# Altium PCB arduinonano.PcbDoc
Units mil, origin at the board's own origin, x right, y up, seen from the top; angles counter-clockwise.
Board outline 750 x 1700 mil, 6 copper layers (Top Layer 1, signal Top, VCC, GND, signal bottom, Bottom Layer 1), stack 35.621 mil thick; 24 components, 42 nets, 163 pads, 68 vias.
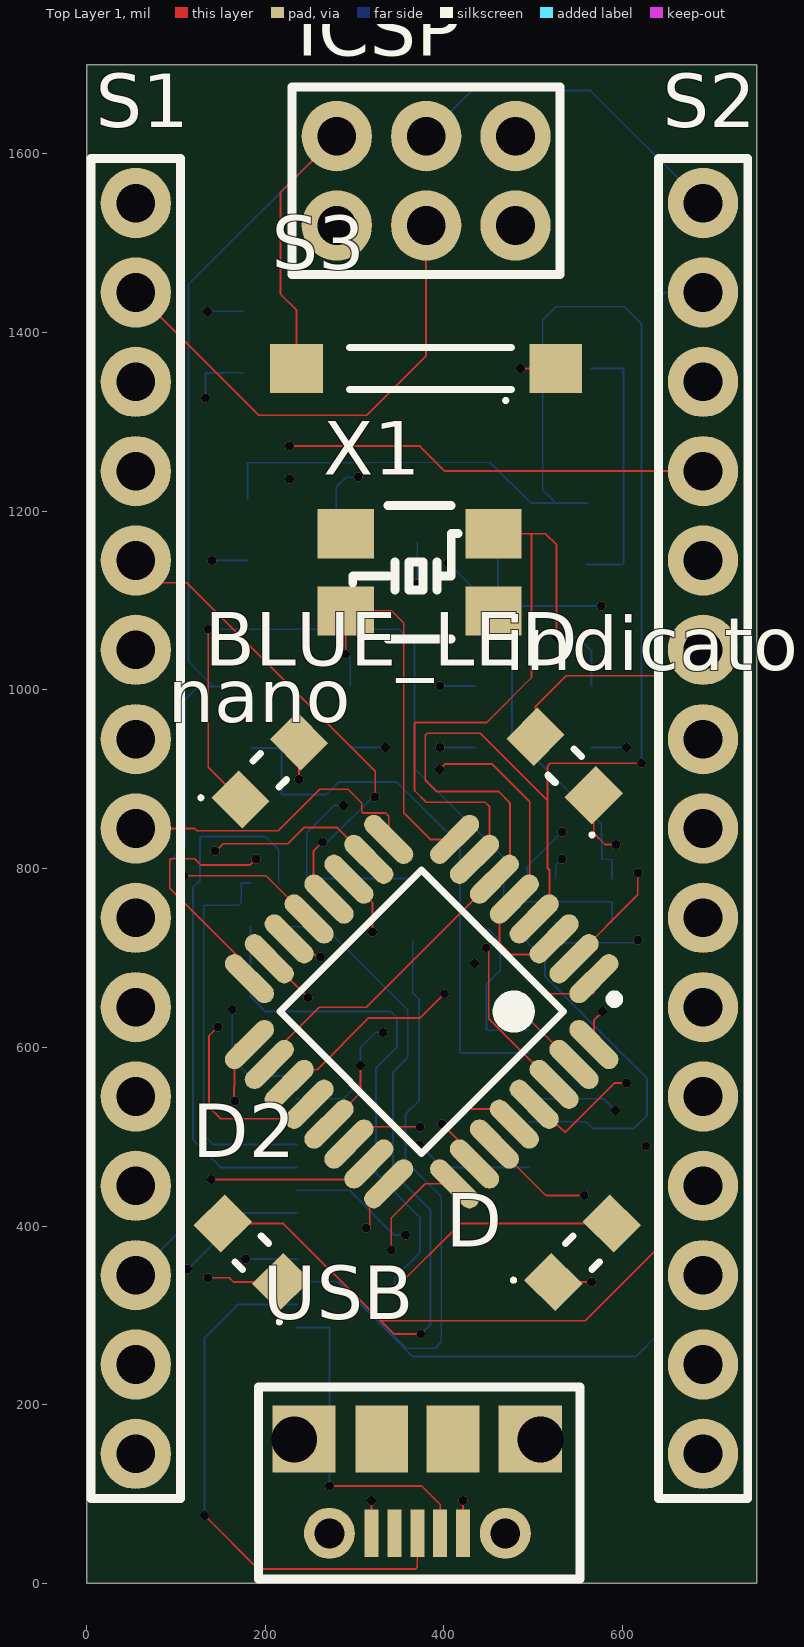
[diagram p0: Top Layer 1 view]
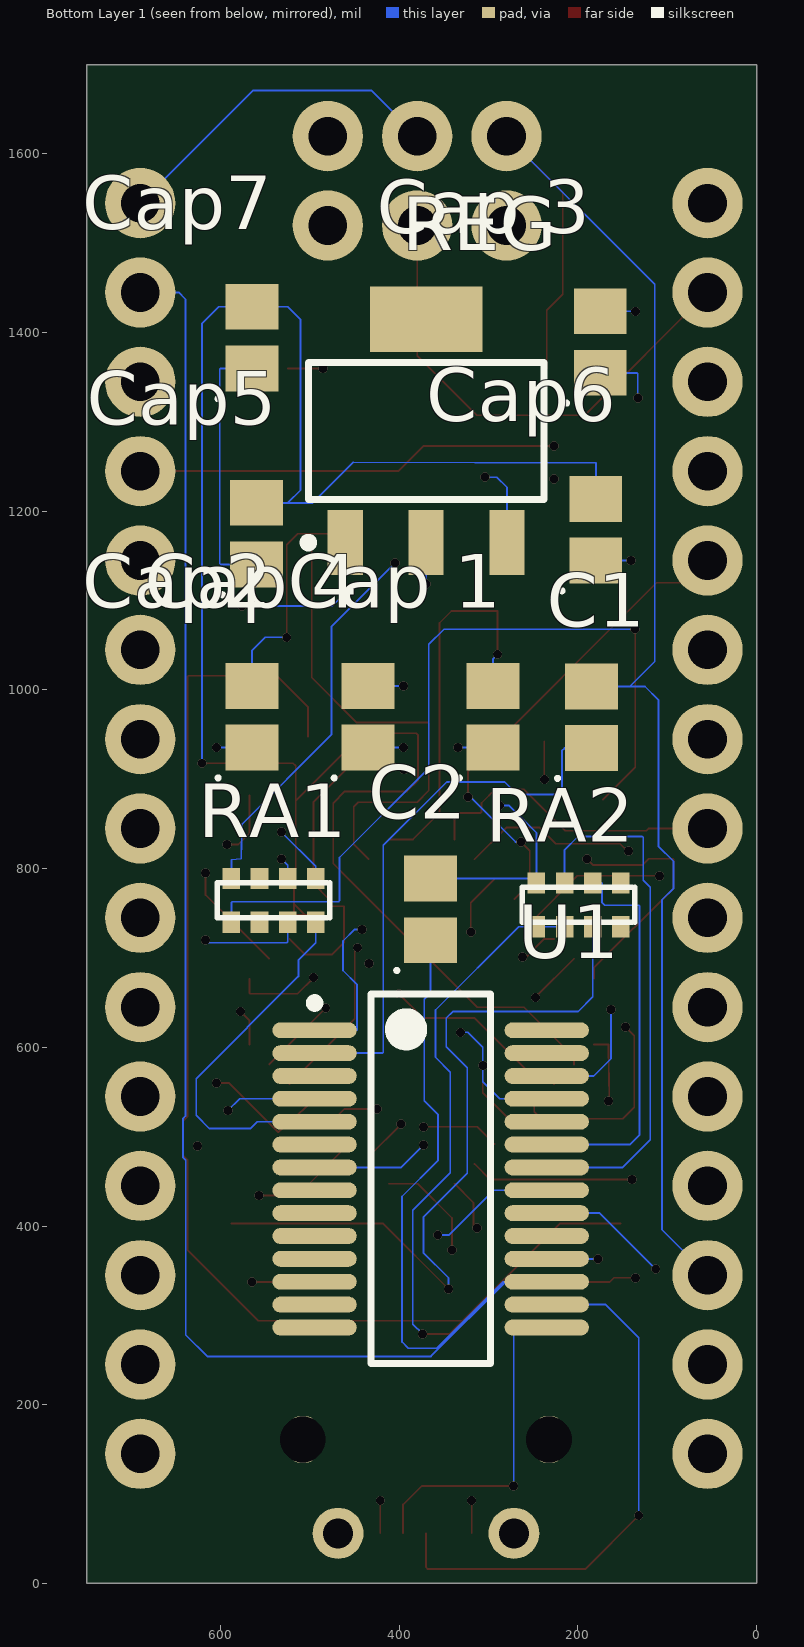
[diagram p1: Bottom Layer 1 view, seen from below]
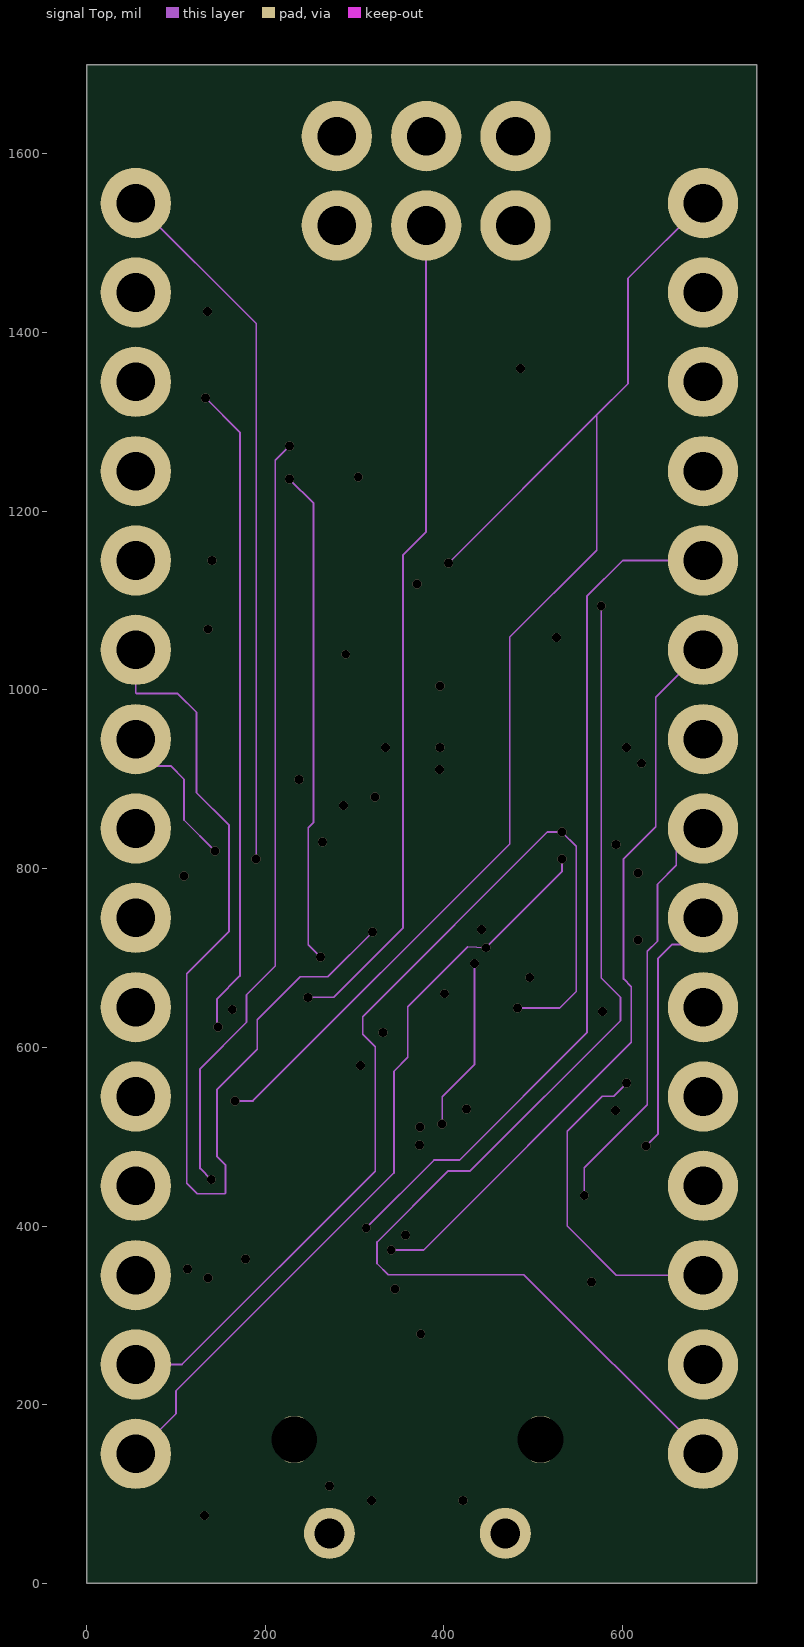
[diagram p2: signal Top]
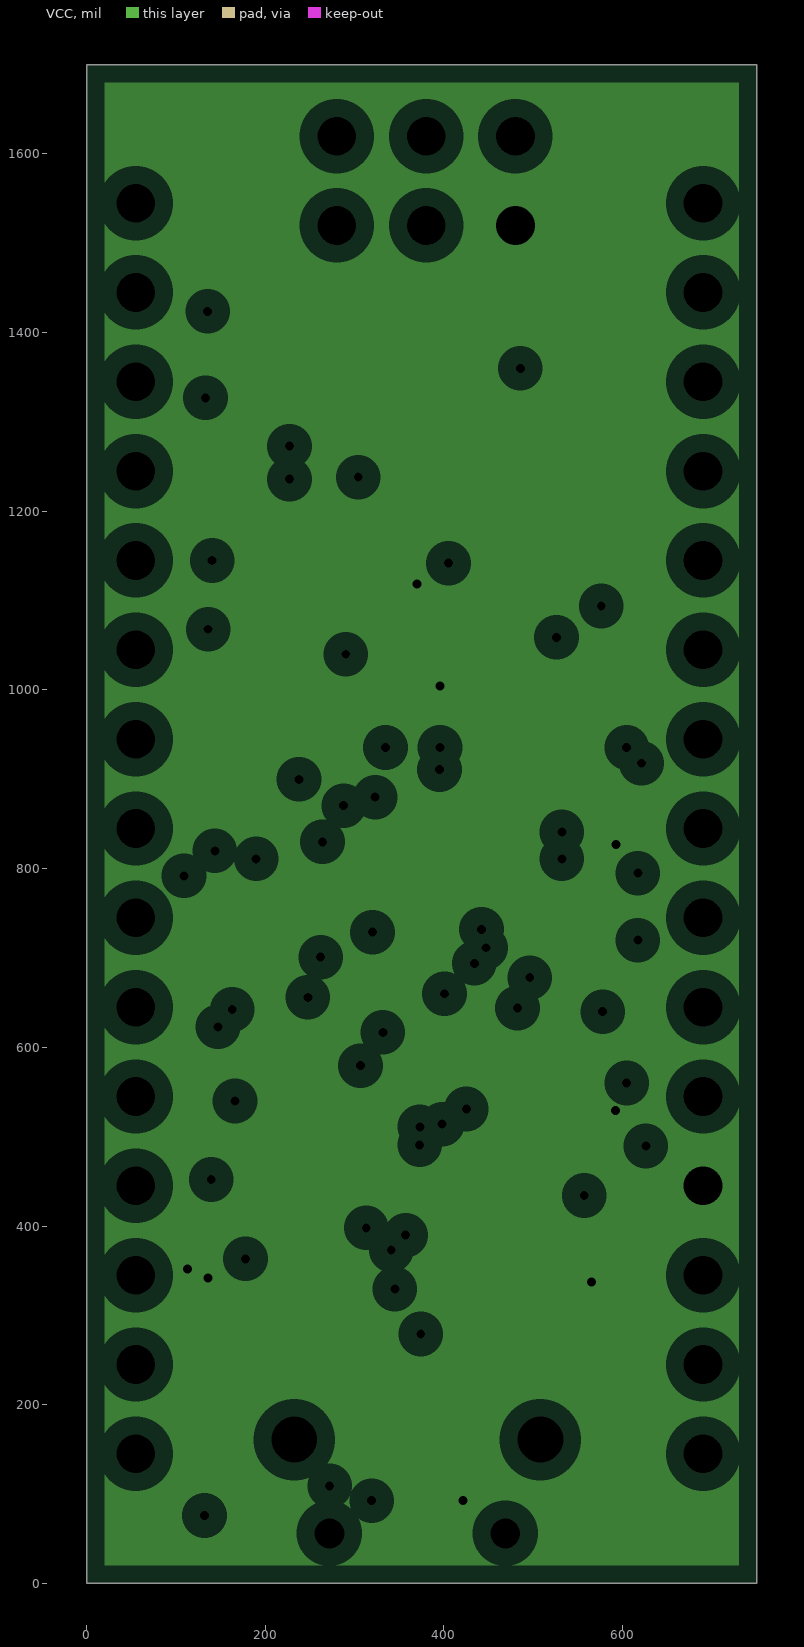
[diagram p3: VCC, clearances drawn from the general rule]
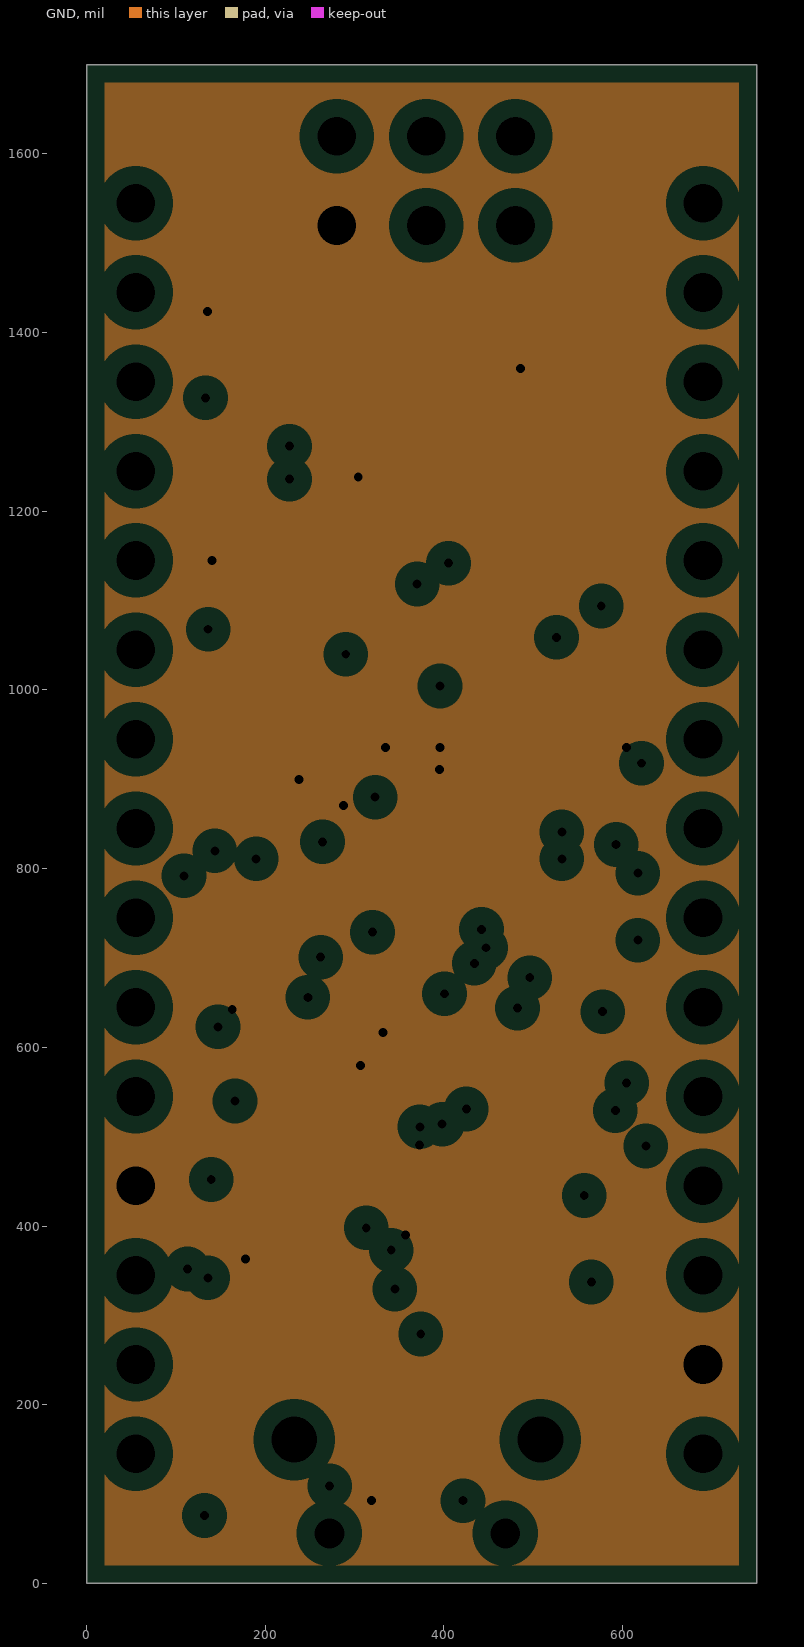
[diagram p4: GND, clearances drawn from the general rule]
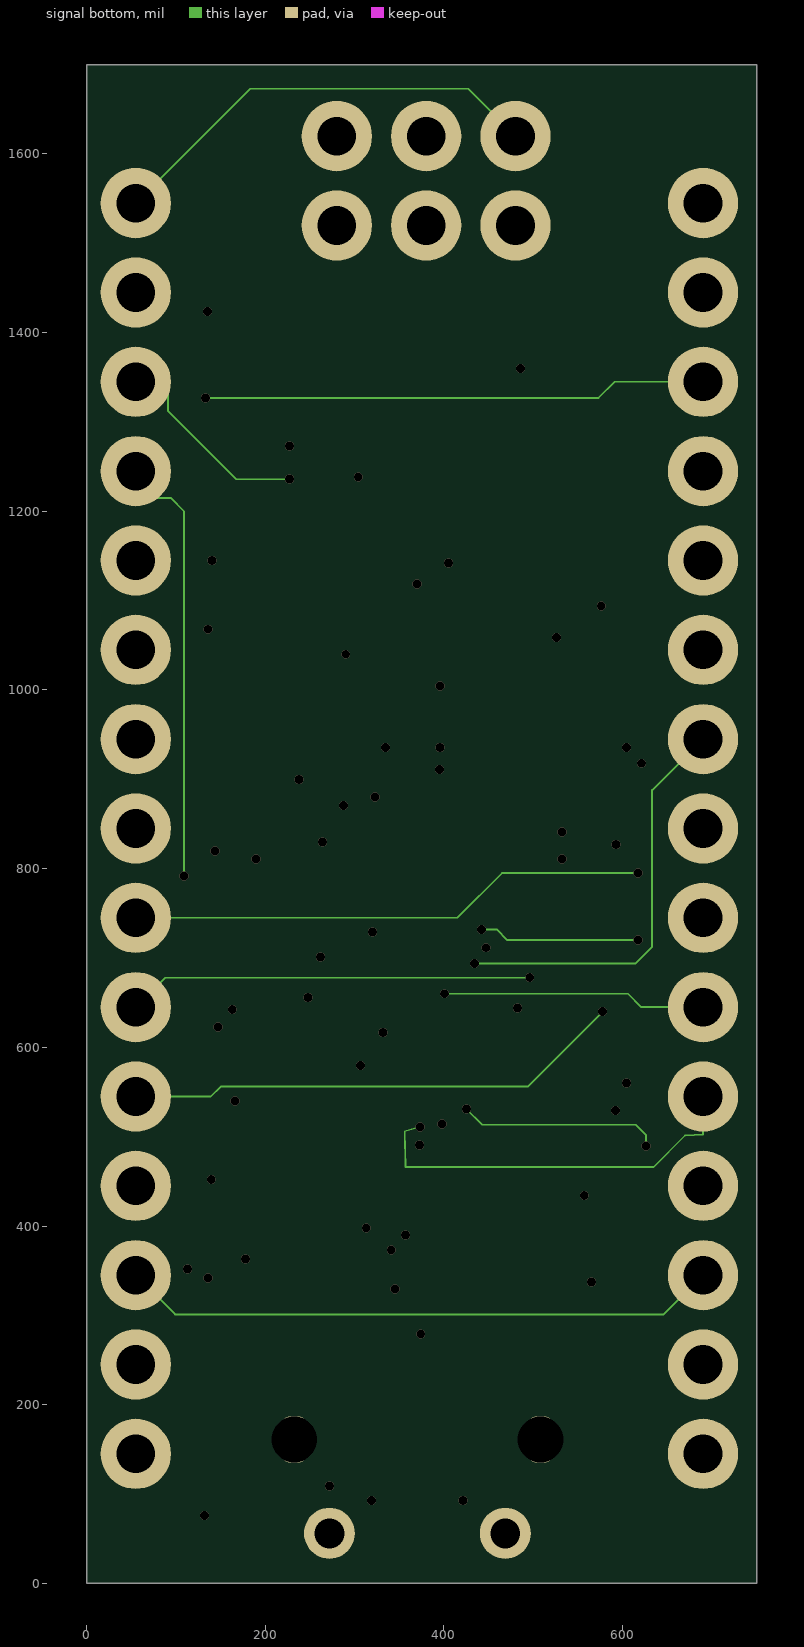
[diagram p5: signal bottom]

## Layer stack, top to bottom
Top Solder: solder mask 0.4, Solder Resist, Dk 3.5
Top Layer 1: signal copper 1.378
Dielectric 6: prepreg 2.8, PP-006, Dk 4.1
Dielectric 4: prepreg 2.8, PP-006, Dk 4.1
signal Top: signal copper 0.3543
Dielectric 2: prepreg 2.8, PP-006, Dk 4.1
VCC: plane copper 1.378, net +5
Dielectric 1: dielectric 12.6, FR-4, Dk 4.8
GND: plane copper 1.378, net gnd
Dielectric 3: prepreg 2.8, PP-006, Dk 4.1
signal bottom: signal copper 0.3543
Dielectric 5: prepreg 2.8, PP-006, Dk 4.1
Dielectric 7: prepreg 2.8, PP-006, Dk 4.1
Bottom Layer 1: signal copper 1.378
Bottom Solder: solder mask 0.4, Solder Resist, Dk 3.5

## Board outline
0,0 750,0 750,1700 0,1700

## Design rules (kind name [scope] priority, off if disabled: settings)
Clearance Clearance_1 [All] p1: gap=10 ignorepadtopadclearanceinfootprint=FALSE
Clearance [All] p2: gap=10 ignorepadtopadclearanceinfootprint=TRUE except(9: Arc-SMDPad Track-SMDPad SMDPad-SMDPad)
HoleSize [All] p1: absolutevalues=TRUE maxlimit=10 minlimit=1 maxpercent=80.000 minpercent=20.000
PlaneClearance [All] p1: clearance=20
PlaneConnect [All] p1: planeconnectstyle=Relief reliefexpansion=20 reliefentries=4 reliefconductorwidth=10 reliefairgap=10
PolygonConnect [All] p1: connectstyle=Relief reliefconductorwidth=10 reliefentries=4 polygonreliefangle="90 Angle" airgapwidth=10
RoutingVias [All] p1: holewidth=10 width=10 viastyle="Through Hole" minholewidth=5 minwidth=5 maxholewidth=8 maxwidth=8
SolderMaskExpansion [All] p1: expansion=4 istentingtop=FALSE
SupplyNets "Schematic Supply Nets_4" [InNet('+5v')] p1: voltage=0.000
SupplyNets "Schematic Supply Nets_3" [InNet('gnd')] p2: voltage=0.000
SupplyNets "Schematic Supply Nets_2" [InNet('+5')] p3: voltage=0.000
SupplyNets "Schematic Supply Nets_1" [InNet('3V3')] p4: voltage=0.000
SupplyNets "Schematic Supply Nets" [InNet('VIN')] p5: voltage=0.000
Width [All] p1: maxlimit=3 minlimit=1.5 preferedwidth=2 minimp=50.000000 maximp=50.000000 favimp=50.000000
27 further rules are at their usual default settings.

## Components (designator, comment, footprint, x,y, rotation, side; value= is the part's Value field where it differs from the comment)
BLUE_LED "Kingbright Blue LED, 60 mcd 120 ° 0805" LED1913X12NBLUE 205,910 r45 top
C1 "C0805C180J5GACTU" CAPCP2012X09N 185,969.45 r90 bottom
C2 "C0805C180J5GACTU" CAPCP2012X09N 365,754.45 r90 bottom
Cap2 "C0805C180J5GACTU" CAPCP2012X09N 565,970 r90 bottom
Cap5 "C0805C180J5GACTU" CAPCP2012X09N 560,1175 r90 bottom
Cap6 "C0805C180J5GACTU" CAPCP2012X09N 180,1179.45 r90 bottom
Cap7 "C0805C180J5GACTU" CAPCP2012X09N 565,1394.45 r90 bottom
"Cap 1" "C0805C180J5GACTU" CAPCP2012X09N 295,970 r90 bottom
"Cap 3" "100nF Ceramic Multilayer Capacitor_1" CAPCP2012X09N 175,1389.45 r90 bottom
"Cap 4" "100nF Ceramic Multilayer Capacitor_1" CAPCP2012X09N 435,970 r90 bottom
D "Kingbright Red LED, 100 mcd 120 ° 0805" LED1913X12NRED 555,370 r45 top
D2 "Kingbright Green LED, 70 mcd 120 ° 0805" LED1913X12NGREEN 185,370 r135 top
ICSP "Programming Headers Dual Row" "ISP HEADER" 1175,1065 r180 top
indicator "Kingbright Green LED, 70 mcd 120 ° 0805" LED1913X12NGREEN 535,915 r135 top
nano "Atmega328/p" TQFP80P900X900X120-32N 375,640 r225 top
RA1 "1k +- 5% SMT Resistor Array" "1206 RA" 587.99,784 r180 bottom
RA2 "1k +- 5% SMT Resistor Array" "1206 RA" 246.5,779 r180 bottom
REG "LM1117MP-5.0/NOPB, Low Dropout Voltage Regulator, 1.5A, 5 V ±1%, 4-Pin SOT-223" SOT230P700X180-4N 370,1290 r90 bottom
S1 "connector;str header;single row;.1 cont centers;.095 tail;gold or gtx;36 contact" Header 55,145 r90 top
S2 "connector;str header;single row;.1 cont centers;.095 tail;gold or gtx;36 contact" Header 690,145 r90 top
S3 "Button Tactile Switch, NO 0.05 A 0.8mm" Button8014X17N 385,1360 r180 top
U1 "FT232RL, Universal Asynchronous Receiver & Transmitter 3MBd, 28-Pin, SSOP" SOP65P780X200-28N 364.92,452.8 r180 bottom
USB "NewMolex Right Angle SMT Female Type B Micro USB Connector, 30 V ac, 1.8A" MicroUSB 418.58,56 r180 top
X1 "Aker 16MHz Crystal SMT" "Aker S5C Crystal" 455.35,1175 r0 top value=16MHz

## Footprints (in the part's own frame and the unit in brackets; to place one, negate y for a bottom-side part, rotate by r counter-clockwise, add the part's x,y. Pads: shape width x height; smd on the part's side, far side on the other; paste and mask are expansions set on the pad)
"1206 RA" [mm]
  rect 0.5x0.6 smd: 1(0,0.127) 2(0.8,0.127) 3(1.6,0.127) 4(2.4,0.127) 5(0,-1.118) 6(0.8,-1.118) 7(1.6,-1.118) 8(2.4,-1.118)
  silkscreen extent -0.41,-0.99 2.79,0.01, body extent -0.41,-1.31 2.79,0.29, height 0.5
"Aker S5C Crystal" [mm]
  rect 1.6x1.4 smd: 1(0,0) 2(-4.2,0) 3(0,-2.2) 4(-4.2,-2.2)
  round 0.254 on Top Overlay: 5(-3,-2.4)
  silkscreen extent -4,-3 -1,0.8, body extent -4.7,-2.8 0.5,0.6, height 1
Button8014X17N [mm] "Chip Inductor, 2-Leads, Body 8.00x1.40mm, IPC Medium Density"
  rect 1.5x1.4 smd: 1(-3.556,0) 2(3.81,0)
  silkscreen extent -2.3,-0.6 2.3,0.96, body extent -3.79,-1.92 4.21,1.78, height 2.5
CAPCP2012X09N [mm] "Chip Capacitor, 2-Leads, Body 2.00x1.25mm, IPC Medium Density"
  rect 1.3x1.5 smd: 1(-0.875,0) 2(0.875,0)
  silkscreen extent -1.79,0.91 -1.69,1.01, body extent -1.05,-0.57 0.95,0.68, height 0.78
Header [mm] "SIL Header"
  round 2 hole 1.1: 1(0,0) 2(2.54,0) 3(5.08,0) 4(7.62,0) 5(10.16,0) 6(12.7,0) 7(15.24,0) 8(17.78,0) 9(20.32,0) 10(22.86,0) 11(25.4,0) 12(27.94,0) 13(30.48,0) 14(33.02,0) 15(35.56,0)
  silkscreen extent -1.27,-1.27 36.83,1.27, body extent -1.33,-1.35 36.93,1.35, height 8.6
"ISP HEADER" [mm] "SIL Header for programming"
  round 2 hole 1.1: 1(17.653,-14.097) 2(17.653,-11.557) 3(20.193,-14.097) 4(20.193,-11.557) 5(22.733,-14.097) 6(22.733,-11.557)
  silkscreen extent 16.38,-15.49 24,-10.16, body extent 16.38,-15.37 24,-10.29, height 8
LED1913X12NBLUE [mm] "LED 2-Leads, Body 1.90x1.32mm, IPC Medium Density"
  rect 1.1x1.25 smd: 1(-1.175,0) 2(1.175,0)
  silkscreen extent -1.99,-0.53 0.15,0.89, body extent -1,-0.62 1.02,0.62, height 1.1
LED1913X12NGREEN [mm] "LED 2-Leads, Body 1.90x1.32mm, IPC Medium Density"
  rect 1.1x1.25 smd: 1(-1.175,0) 2(1.175,0)
  silkscreen extent -1.99,-0.53 0.15,0.89, body extent -1.01,-0.62 1.01,0.63, height 1.1
LED1913X12NRED [mm] "LED 2-Leads, Body 1.90x1.32mm, IPC Medium Density"
  rect 1.1x1.25 smd: 1(-1.175,0) 2(1.175,0)
  silkscreen extent -1.99,-0.53 0.15,0.89, body extent -1.02,-0.43 1.04,0.47, height 0.85
MicroUSB [mm] "MicroUSB  Molex 5Pin"
  rect 0.4x1.35 smd: 1(-0.07,0) 2(0.58,0) 3(1.23,0) 4(1.88,0) 5(2.53,0)
  rrect50% 0.6x1.3 hole 1.3: ""(-2.27,-2.667) ""(-2.27,-2.667) ""(4.73,-2.667)
  rect 1.8x1.9 smd: ""(-1.98,-2.678) ""(4.45,-2.678)
  round 1.45 hole 0.85: ""(-1.27,0) ""(3.73,0)
  rect 1.5x1.9 smd: ""(0.218,-2.678) ""(2.242,-2.678)
  silkscreen extent -3.39,-4.17 5.75,1.3, body extent -2.83,-5.32 5.37,0.11, height 2.68
SOP65P780X200-28N [mm] "SOP, 28-Leads, Body 10.20x5.30mm, Pitch 0.65mm, IPC Medium Density"
  oval 2.4x0.45 smd: 1(-3.3,4.225) 2(-3.3,3.575) 3(-3.3,2.925) 4(-3.3,2.275) 5(-3.3,1.625) 6(-3.3,0.975) 7(-3.3,0.325) 8(-3.3,-0.325) 9(-3.3,-0.975) 10(-3.3,-1.625) 11(-3.3,-2.275) 12(-3.3,-2.925) 13(-3.3,-3.575) 14(-3.3,-4.225) 15(3.3,-4.225) 16(3.3,-3.575) 17(3.3,-2.925) 18(3.3,-2.275) 19(3.3,-1.625) 20(3.3,-0.975) 21(3.3,-0.325) 22(3.3,0.325) 23(3.3,0.975) 24(3.3,1.625) 25(3.3,2.275) 26(3.3,2.925) 27(3.3,3.575) 28(3.3,4.225)
  silkscreen extent -3.43,-5.25 1.7,5.25, body extent -3.91,-5.1 3.91,5.1, height 2
SOT230P700X180-4N [mm] "SOT223, 4-Leads, Body 6.50x7.00mm (avg), Pitch 2.30mm, IPC Medium Density"
  rect 1.85x1 smd: 1(-3.175,2.3) 2(-3.175,0) 3(-3.175,-2.3)
  rect 1.85x3.2 smd: 4(3.175,0)
  silkscreen extent -3.3,-3.35 1.95,3.48, body extent -3.8,-3.12 3.29,3.38, height 1.65
TQFP80P900X900X120-32N [mm] "TQFP, 32-Leads, Body 7.00x7.00mm, Pitch 0.80mm, IPC Medium Density"
  oval 1.75x0.55 smd: 1(-4.125,2.8) 2(-4.125,2) 3(-4.125,1.2) 4(-4.125,0.4) 5(-4.125,-0.4) 6(-4.125,-1.2) 7(-4.125,-2) 8(-4.125,-2.8) 17(4.125,-2.8) 18(4.125,-2) 19(4.125,-1.2) 20(4.125,-0.4) 21(4.125,0.4) 22(4.125,1.2) 23(4.125,2) 24(4.125,2.8)
  oval 0.55x1.75 smd: 9(-2.8,-4.125) 10(-2,-4.125) 11(-1.2,-4.125) 12(-0.4,-4.125) 13(0.4,-4.125) 14(1.2,-4.125) 15(2,-4.125) 16(2.8,-4.125) 25(2.8,4.125) 26(2,4.125) 27(1.2,4.125) 28(0.4,4.125) 29(-0.4,4.125) 30(-1.2,4.125) 31(-2,4.125) 32(-2.8,4.125)
  silkscreen extent -4.25,-2.85 2.85,3.75, body extent -4.44,-4.5 4.56,4.5, height 1.6

## Part data
BLUE_LED: Color=Blue, Forward Voltage=3.5V, Manufacturer=KingBright, Manufacturer Part No.=KP-2012PBC-A, Creator="Ritesh Kanjee", Datasheet URL=http://za.rs-online.com/web/p/visible-leds/4663784/, Date Created="18 February 2015", RS Stock No.=466-3784
C1 Cap2: library part "18pF Ceramic Multilayer Capacitor, 50 V dc C0G Dielectric ±5% SMD", "18pF Ceramic Multilayer Capacitor, 50 V dc C0G Dielectric ±5% SMD", Capacitance=18pF, Manufacturer=Kemet, Package=0805, Voltage=50V, Creator="Ritesh Kanjee", Datasheet URL=http://za.rs-online.com/web/p/ceramic-multilayer-capacitors/6480935/?searchTerm=C0805C180J5GACTU&relevancy-data=636F3D3226696E3D4931384E4B6E6F776E41734D504E266C753D656E266D6D3D6D61746368616C6C7061727469616C26706D3D5E5B5C707B4C7D5C707B4E647D2D2C2F255C2E5D2B2426706F3D313326736E3D592673743D4D414E5F504152545F4E554D4245522677633D424F5448267573743D4330383035433138304A35474143545526, Date Created="18 February 2015", RS Stock No.=648-0935
C2: library part "18pF Ceramic Multilayer Capacitor, 50 V dc C0G Dielectric ±5% SMD", "18pF Ceramic Multilayer Capacitor, 50 V dc C0G Dielectric ±5% SMD", Capacitance=100nF, Manufacturer=Kemet, Package=0805, Voltage=50V, Creator="Ritesh Kanjee", Datasheet URL=http://za.rs-online.com/web/p/ceramic-multilayer-capacitors/6480935/?searchTerm=C0805C180J5GACTU&relevancy-data=636F3D3226696E3D4931384E4B6E6F776E41734D504E266C753D656E266D6D3D6D61746368616C6C7061727469616C26706D3D5E5B5C707B4C7D5C707B4E647D2D2C2F255C2E5D2B2426706F3D313326736E3D592673743D4D414E5F504152545F4E554D4245522677633D424F5448267573743D4330383035433138304A35474143545526, Date Created="18 February 2015", RS Stock No.=648-0935
Cap5 Cap7: library part "18pF Ceramic Multilayer Capacitor, 50 V dc C0G Dielectric ±5% SMD", "18pF Ceramic Multilayer Capacitor, 50 V dc C0G Dielectric ±5% SMD", Capacitance=1uF, Manufacturer=Kemet, Package=0805, Voltage=50V, Creator="Ritesh Kanjee", Datasheet URL=http://za.rs-online.com/web/p/ceramic-multilayer-capacitors/6480935/?searchTerm=C0805C180J5GACTU&relevancy-data=636F3D3226696E3D4931384E4B6E6F776E41734D504E266C753D656E266D6D3D6D61746368616C6C7061727469616C26706D3D5E5B5C707B4C7D5C707B4E647D2D2C2F255C2E5D2B2426706F3D313326736E3D592673743D4D414E5F504152545F4E554D4245522677633D424F5448267573743D4330383035433138304A35474143545526, Date Created="18 February 2015", RS Stock No.=648-0935
Cap6: library part "18pF Ceramic Multilayer Capacitor, 50 V dc C0G Dielectric ±5% SMD", "18pF Ceramic Multilayer Capacitor, 50 V dc C0G Dielectric ±5% SMD", Capacitance=7uF, Manufacturer=Kemet, Package=0805, Voltage=16v, Creator="Ritesh Kanjee", Datasheet URL=http://za.rs-online.com/web/p/ceramic-multilayer-capacitors/6480935/?searchTerm=C0805C180J5GACTU&relevancy-data=636F3D3226696E3D4931384E4B6E6F776E41734D504E266C753D656E266D6D3D6D61746368616C6C7061727469616C26706D3D5E5B5C707B4C7D5C707B4E647D2D2C2F255C2E5D2B2426706F3D313326736E3D592673743D4D414E5F504152545F4E554D4245522677633D424F5448267573743D4330383035433138304A35474143545526, Date Created="18 February 2015", RS Stock No.=648-0935
"Cap 1": library part "18pF Ceramic Multilayer Capacitor, 50 V dc C0G Dielectric ±5% SMD", "18pF Ceramic Multilayer Capacitor, 50 V dc C0G Dielectric ±5% SMD", Capacitance=18uF, Manufacturer=Kemet, Package=0805, Voltage=50V, Creator="Ritesh Kanjee", Datasheet URL=http://za.rs-online.com/web/p/ceramic-multilayer-capacitors/6480935/?searchTerm=C0805C180J5GACTU&relevancy-data=636F3D3226696E3D4931384E4B6E6F776E41734D504E266C753D656E266D6D3D6D61746368616C6C7061727469616C26706D3D5E5B5C707B4C7D5C707B4E647D2D2C2F255C2E5D2B2426706F3D313326736E3D592673743D4D414E5F504152545F4E554D4245522677633D424F5448267573743D4330383035433138304A35474143545526, Date Created="18 February 2015", RS Stock No.=648-0935
"Cap 3": "AVX 0805 Standard 100nF Ceramic Multilayer Capacitor, 50 V dc X7R Dielectric ±10% SMD", Capacitance=100nF, Manufacturer=AVX, Package=0805, Voltage=50V, Creator="Ritesh Kanjee", Datasheet URL=http://za.rs-online.com/web/p/ceramic-multilayer-capacitors/4646688/, Date Created="18 February 2015", RS Stock No.=464-6688
"Cap 4": "AVX 0805 Standard 100nF Ceramic Multilayer Capacitor, 50 V dc X7R Dielectric ±10% SMD", Capacitance=1uF, Manufacturer=AVX, Package=0805, Voltage=50V, Creator="Ritesh Kanjee", Datasheet URL=http://za.rs-online.com/web/p/ceramic-multilayer-capacitors/4646688/, Date Created="18 February 2015", RS Stock No.=464-6688
D: Color=RED, Forward Voltage=1.85V, Manufacturer=KingBright, Manufacturer Part No.=KP-2012SRC-PRV, Creator="Ritesh Kanjee", Datasheet URL=http://za.rs-online.com/web/p/visible-leds/4663813/, Date Created="18 February 2015", RS Stock No.=466-3813
D2: Color=Green, Forward Voltage="2.1 V", Manufacturer=KingBright, Manufacturer Part No.=KP-2012MGC, Creator="Ritesh Kanjee", Datasheet URL=http://za.rs-online.com/web/p/visible-leds/4663778/, Date Created="18 February 2015", RS Stock No.=466-3778
ICSP: library part "Programming ISP, Programming Headers Dual Row", Current Rating="3Amps Continuous", Manufacturer=FCI, Manufacturer Part No.=68000-236HLF, Created By="R Kanjee", Date Created="1 March 2015", RS Stock No.=2509565626
indicator: Color=Green, Forward Voltage="3.5 V", Manufacturer=KingBright, Manufacturer Part No.=KP-2012MGC, Creator="Ritesh Kanjee", Datasheet URL=http://za.rs-online.com/web/p/visible-leds/4663778/, Date Created="18 February 2015", RS Stock No.=466-3778
nano: library part "Atmega 328p", "The Atmel® ATmega328P is a low-power CMOS 8-bit microcontroller based on the AVR® enhanced RISC architecture. By  / executing powerful instructions in a single clock cycle, the ATmega328P achieves throughputs approaching 1MIPS per MHz  / allowing the system designer to optimize power consumption versus processing speed.", ComponentLink1Description="New link", ComponentLink2Description="New link 1", ComponentLink3Description="New link 2", ComponentLink4Description="New link 3"
RA1 RA2: "1k +- 5% SMT Resistor Array 4 Res", Manufacturer=Bourns, Manufacturer Part No.=CAY16-102J4LF, Creator="R Kanjee", Date Created="25 February 2015", RS Stock No.=552-5579, Wattage=0.25W
REG: library part LM1117MP-5.0, Manufacturer="Texas Instruments", Maximum Input Voltage=15V, Output Voltage=5V, Supply Current=1.5Amps, Created By="R Kanjee", Datasheet URL=http://za.rs-online.com/web/p/low-dropout-voltage-regulators/5339583/, Date Created="26 February 2015", RS Stock No.=533-9583
S1 S2: library part "Single row; PCB headers", Current Rating="3Amps Continuous", Manufacturer=FCI, Manufacturer Part No.=68000-236HLF, Created By="R Kanjee", Date Created="1 March 2015", RS Stock No.=2509565626
S3: Manufacturer="C & K", Manufacturer Part No.=B3F1000, Creator="R Kanjee", Date Created="25 February 2015", RS Stock No.=516-255, State="Normaly Open"
U1: library part "FT232RL USB to UART, Universal Asynchronous Receiver & Transmitter 3MBd, 28-Pin, SSOP", Manufacturer="FTDI Chip", Manufacturer Part No.=FT232RL, Creator="R Kanjee", Date Created="03 March 2015", Pin Count=28, RS Stock No.=406-580
USB: library part "Micro USB Connector, 30 V ac, 1.8A", Manufacturer=Molex, Manufacturer Part No.=105017-0001, Max Current=1.8A, Max Voltage=30V, Creator="R Kanjee", Datasheet URL=http://za.rs-online.com/web/p/micro-usb-connectors/8486764/, Date Created="28 February 2015", RS Stock No=848-6764
X1: library part "Aker  C5S-16.000-12-3030-X", "Aker S5C SMT Crystal", Frequency Stability=+/-30ppm, Load Capacitance=12pF, Manufacturer=Aker, Manufacturer Part #=C5S-16.000-12-3030-X, Package="3.2x5mm SMD", Creator="R Kanjee", HelpURL=http://za.rs-online.com/web/p/crystal-units/6719488/, RS="RS 671-9488", RS Stock Nr.=671-9488, Supplier=RS

## Via types
v1: diameter 10, hole 10, Top Layer 1 to Bottom Layer 1, 68 vias

## Nets (pads, with @x,y where several pads share a name; then routed paths per layer and width w, separated by ;. In a path a pad name is that pad's centre, name@x,y a point inside that pad or via, vN(x,y) a via of type N, cw(c..) or ccw(c..) an arc to the next point about the centre after c; other vN are vias at no path point)
3V3: C2.1 S2.14 U1.17 | length 2289.4
  Bottom Layer 1 w2: U1.17 U1.17@281,337.64 ; C2.1 365,661.02 372.02,654 372.02,540.19 356.83,525 356.83,473.17 397.02,432.98 397.02,270.23 390,263.21 358,263.21 283.57,337.64 U1.17@281,337.64 ; S2.14 647,1445 639.38,1437.38 639.38,523.23 642,520.61 642,476.5 639,473.5 639,278 615,254 364.64,254 U1.17@281,337.64
+5: "Cap 4.2" D2.1 D.1 ICSP.2 indicator.1 REG.2 S2.4 U1.4 U1.20 USB.1 | length 572.4
  Top Layer 1 w2: v1(135.73,342) 159.69,342 164.4,337.29 D2.1 ; USB.1 v1(421.34,92.58) ; D.1 v1(565,337.29) ; indicator.1 567.71,839.58 580.21,827.08 v1(592.71,827.08)
  Bottom Layer 1 w2: v1(112.98,351.79) 175.6,414.41 U1.20 ; v1(370,1118.58) REG.2 ; v1(395.47,1004.45) 435,1004.45 ; U1.4 578.79,542.36 v1(591.86,529.3)
+5v: Cap5.2 Cap6.2 Cap7.2 nano.4 nano.6 nano.18 | length 2349.7
  Top Layer 1 w2: nano.18 204.49,588.8 260.48,644.8 312.98,644.8 nano.6 474,805.81 474,873.45 461,886.45 391.55,886.45 379,899 379,949.55 381,951.55 440.45,951.55 516,876 ; v1(621,918) 519,918 516,915 516,876 ; nano.4@505.27,748 518,748 nano.4@518,760.73 ; nano.4@505.27,748 500.97,748 nano.4 nano.4@505.27,748 ; nano.4@505.27,748 nano.4@518,760.73 ; 516,801 516,876 ; 516,801 516,800 518,798 ; 516,801 518,799 518,798 ; nano.4@518,760.73 518,798
  Bottom Layer 1 w2: Cap6.2 180,1254 451.45,1255 497,1209.45 525,1209.45 ; Cap5.2 525,1209.45 ; v1(621,918) 621,1409.9 602,1428.9 Cap7.2 525,1428.9 510.55,1414.45 510.55,1223.9 525,1209.45
A0: nano.23 S2.12 | length 1525.8
  Top Layer 1 w2: v1(139.5,452) 298.35,452 nano.23 ; v1(227,1273) 373,1273 401,1245 S2.12
  signal Top w2: v1(139.5,452) 127,464.5 127,576.02 178.98,628 178.98,658.98 211,691 211,1257 v1(227,1273)
A1: nano.24 S2.11 | length 1035.4
  Top Layer 1 w2: v1(313,398) 314,397 316,397 317,398 317,426.1 nano.24
  signal Top w2: v1(313,398) 388.77,473.77 417.38,473.77 560,616.39 560,1105 600,1145 S2.11
A2: nano.25 S2.10 | length 967.5
  Top Layer 1 w2: v1(341,373) 341,409 379.22,447.22 nano.25
  signal Top w2: v1(341,373) 377.06,373 609.6,605.54 609.6,668 601,676.6 601,811 637,847 637,992 S2.10
A3: nano.26 S2.9 | length 717.2
  Top Layer 1 w2: v1(398,514) 434.16,477.84 nano.26
  signal Top w2: v1(398,514) 398,544.5 434,580.5 v1(434,694)
  signal bottom w2: v1(434,694) 614.5,694 633,712.5 633,888 S2.9
A4: nano.27 S2.8 | length 607.9
  Top Layer 1 w2: nano.27 514,434.19 v1(557,434.19)
  signal Top w2: v1(557,434.19) 557,465 627.63,535.63 627.63,707.37 639,718.74 639,782.63 660,803.63 660,845 S2.8
A5: nano.28 S2.7 | length 588.8
  Top Layer 1 w2: v1(425,531) 461.73,531 nano.28
  signal Top w2: v1(626,489.5) 639.63,503.13 639.63,699.63 655,715 690,715 S2.7
  signal bottom w2: v1(425,531) 442.7,513.3 614.7,513.3 626,502 v1(626,489.5)
A6: nano.19 S2.6 | length 516.8
  Top Layer 1 w2: nano.19 226.76,567.76 234,575 258,575 316,633 373.5,633 v1(400.5,660)
  signal bottom w2: v1(400.5,660) 606,660 621,645 S2.6
A7: nano.22 S2.5 | length 535.5
  Top Layer 1 w2: nano.22 312.81,511 v1(373,511)
  signal bottom w2: v1(373,511) 356,506 357,466 634.5,466 669.8,501.3 690,502.3 S2.5
AREF: "Cap 3.1" nano.20 S2.13 | length 1630
  Top Layer 1 w2: v1(147,623) 137,613 137,533 150,520 241,520 249.03,528.03 nano.20
  signal Top w2: v1(133,1327) 171.5,1288.5 171.5,680 146,654.5 146,624 v1(147,623)
  signal bottom w2: v1(133,1327) 573,1327 591,1345 S2.13
  Bottom Layer 1 w2: v1(133,1327) 133,1354 ; 133,1354 175,1355 134,1355 133,1354
blueled: BLUE_LED.1 RA1.5 | length 916
  Top Layer 1 w2: v1(136,1068) 136,913.58 BLUE_LED.1
  Bottom Layer 1 w2: v1(136,1068) 350,1068 367,1051 367,912.5 467,812.5 467,764 468,763 586.99,763 587.99,762 RA1.5
D2: nano.32 S1.5 | length 602.9
  Top Layer 1 w2: nano.32 567.78,630.18 v1(577.6,640)
  signal bottom w2: S1.5 138.98,545 150,556.02 493.62,556.02 v1(577.6,640)
D3: nano.1 S1.6 | length 550.2
  Top Layer 1 w2: v1(496,678) 514,660 566.78,660 567.78,661 nano.1
  signal bottom w2: S1.6 88,678 v1(496,678)
D4: nano.2 S1.7 | length 708.2
  Top Layer 1 w2: nano.2 617,770.64 v1(617,795)
  signal bottom w2: S1.7 414.94,745 464.94,795 v1(617,795)
D5: nano.9 S1.8 | length 348
  Top Layer 1 w2: S1.8 121,845 123.5,842.5 214.37,842.5 260.87,889 292.52,889 308,873.52 308,863.28 309,862.28 334.72,862.28 338.11,858.89 nano.9
D6: nano.10 S1.9 | length 382.3
  Top Layer 1 w2: v1(143.5,820) 145,820 153,828 225.04,828 243.04,846 280.35,846 nano.10
  signal Top w2: S1.9 55,915 94,915 109,900 109,854.5 v1(143.5,820)
D7: nano.11 S1.10 | length 1192.1
  Top Layer 1 w2: nano.11 320,761.81 v1(320,729)
  signal Top w2: S1.10 55,997 56,996 102,996 123,975 123,885 159.5,848.5 159.5,730 112,682.5 112,448 124,436 154.5,436 155.5,437 155.5,468 146,477.5 146,552.95 190.98,597.93 190.98,630.98 239,679 270,679 v1(320,729)
D8: nano.12 S1.11 | length 564.5
  Top Layer 1 w2: S1.11 55,1120 112.09,1120 323,909.09 v1(323,880) ; v1(264,830) 254,820 254,783.27 nano.12
  Bottom Layer 1 w2: v1(264,830) 270,830 320,880 v1(323,880)
D9: nano.13 S1.12 | length 658.2
  Top Layer 1 w2: v1(109,792) 200.73,792 nano.13
  signal bottom w2: S1.12 55,1215 94,1215 109,1200 v1(109,792)
D10: nano.14 S1.13 | length 834.4
  Top Layer 1 w2: nano.14 237.57,721.43 258,701 v1(262,701)
  signal Top w2: v1(227,1236) 254,1209 254,852 248,846 248,715 v1(262,701)
  signal bottom w2: S1.13 91,1345 91,1312.5 167.5,1236 v1(227,1236)
D11/MOSI: ICSP.4 nano.15 S1.14 | length 1552.3
  Top Layer 1 w2: S1.14 192.5,1307.5 313.5,1307.5 380,1374 ICSP.4 ; nano.15 v1(247.65,656)
  signal Top w2: v1(247.65,656) 276.65,656 354,733.35 354,1151 380,1177 ICSP.4
D12/MISO: ICSP.1 nano.16 S1.15 | length 1562.8
  Top Layer 1 w2: nano.16 182.22,689.02 93,778.24 93,810 94,811 121,811 128,804 182.75,804 v1(189.75,811)
  signal Top w2: S1.15 189.75,1410.25 v1(189.75,811)
  signal bottom w2: S1.15 183,1673 427,1673 ICSP.1
D13/SCK: ICSP.3 nano.17 RA1.1 S2.15 | length 2365.5
  Top Layer 1 w2: v1(166,540.02) 165,541.02 166,603.11 nano.17
  signal Top w2: v1(166,540.02) 186.11,540.02 473.66,827.57 473.66,1059.28 571,1156.63 571,1308 ; v1(405,1142) 571,1308 ; S2.15 606,1461 606,1343 571,1308
  Bottom Layer 1 w2: ICSP.3 431,1671 564,1671 S2.15 ; v1(405,1142) 476,1071 476,950 576,850 577,811 587.99,810 RA1.1
gnd: "Cap 1.1" "Cap 3.2" "Cap 4.1" BLUE_LED.2 C2.2 Cap2.1 Cap6.1 ICSP.6 nano.3 nano.5 nano.21 RA2.1 REG.3 S1.4 S2.2 S3.1 U1.7 U1.18 U1.21 U1.25 U1.26 USB.5 | length 1712.5
  Top Layer 1 w2: v1(237.71,900) BLUE_LED.2 ; nano.21 306.5,549.23 v1(306.5,579.5) ; USB.5 v1(318.98,92.58) ; v1(395,911) 401.05,917.05 453.95,917.05 496,875 496,783.27 nano.5 478.7,758 462,758 462,717 475,704 505.81,704 nano.3 ; v1(485.47,1360) S3.1
  Bottom Layer 1 w2: v1(135.47,1423.9) 175,1423.9 ; v1(140.47,1145) Cap6.1 ; v1(162.98,642.3) 163,587.5 182.55,567.95 U1.26 ; v1(177.75,363.23) U1.18 ; U1.21 294.31,440 344.52,389.79 v1(357.02,389.79) ; U1.25 287.5,542.36 306.52,561.38 306.52,600 323.31,616.8 v1(331.52,616.8) ; RA2.1 RA2.1@246.5,789 ; REG.3 279.45,1226.87 290.76,1238.19 v1(304,1238.19) ; v1(287.75,870.58) 276.83,870.58 246.5,840.24 RA2.1@246.5,789 ; 295,935.55 v1(334.53,935.55) ; C2.2 365,789 RA2.1@246.5,789 ; v1(372.83,490.8) 398.03,465.59 U1.7 ; v1(395.47,935.55) 395.47,934.02 397,935.55 435,935.55 ; Cap2.1 v1(604.53,935.55)
greenled: D2.2 indicator.2 RA2.5 RA2.6 | length 2017.3
  Top Layer 1 w2: D2.2 220.29,402.71 329,294 ; v1(374,279.21) 343.79,279.21 329,294 ; indicator.2 502.29,981.29 537,1016 636,1016 637,1015 637,522.99 642,517.99 642,478.5 637,473.5 637,373 558,294 329,294
  Bottom Layer 1 w2: RA2.6 RA2.5 266.3,735 359.52,641.78 359.52,588.8 343.02,572.3 343.02,459.79 385.02,417.79 385.02,290.23 v1(374,279.21)
NetC1_1: C1.1 U1.2 | length 626.6
  Bottom Layer 1 w2: C1.1 215,935 218,932 218,884 219,883 268,883 282,897 347,897 418,826 418,594.54 419,593.54 U1.2
NetCap2_2: Cap2.2 nano.7 X1.1 | length 810.2
  Top Layer 1 w2: nano.7 451,827.35 451,869.32 445.87,874.45 380.05,874.45 367,887.5 367,962.55 368,963.55 447.55,963.55 498,1014 498,1174 497,1175 ; X1.1 497,1175 ; v1(526,1059) 526,1162.5 513.5,1175 497,1175
  Bottom Layer 1 w2: v1(526,1059) 550,1059 565,1044 Cap2.2
NetCap5_1: Cap5.1 Cap7.1 | length 295.3
  Bottom Layer 1 w2: Cap5.1 600,1140.55 601,1141.55 601,1359 600,1360 Cap7.1
"NetCap 1_2": "Cap 1.2" nano.8 X1.4 | length 438.2
  Top Layer 1 w2: v1(290,1040) X1.4 341.61,1088.39 355,1075 355,862.5 384.72,832.78 nano.8
  Bottom Layer 1 w2: v1(290,1040) 295,1035 295,1004.45
NetU1_15: U1.15 USB.2 | length 379.1
  Top Layer 1 w2: v1(272,109) 375,109 395.75,88.25 USB.2
  Bottom Layer 1 w2: U1.15 272,286.46 v1(272,109)
NetU1_16: U1.16 USB.3 | length 619.2
  Top Layer 1 w2: v1(132,76) 192,16 368.16,16 370.16,18 USB.3
  Bottom Layer 1 w2: v1(132,76) 132,275.05 169,312.05 U1.16
pin22: RA2.2 U1.22 | length 602.2
  Bottom Layer 1 w2: RA2.2 215,821 200,836 128,836 127,835 127,787 119,779 119,496.5 149.91,465.59 U1.22
pin23: RA2.3 U1.23 | length 440.2
  Bottom Layer 1 w2: RA2.3 173.5,784 173,783.5 173,762 170,759 132,759 131,758 131,502.18 142,491.18 U1.23
redled: D.2 RA2.7 | length 870.3
  Top Layer 1 w2: v1(345,329.5) 418.21,402.71 D.2
  Bottom Layer 1 w2: RA2.7 183.5,656.5 200,640 340.31,640 347.52,632.8 347.52,600.8 324,577.28 324,459 373.02,409.98 373.02,370.02 345,342 v1(345,329.5)
RESET: C1.2 ICSP.5 nano.29 S1.3 S2.3 S3.2 | length 2928.3
  Top Layer 1 w2: S3.2 235,1425 217,1443 217,1557 ICSP.5 ; nano.29 535.56,505 590.56,560 v1(604.5,560)
  signal Top w2: v1(604.5,560) 589.8,545.3 577,545.3 538,506.3 538,400 593,345 S2.3
  signal bottom w2: S1.3 99,301 646,301 S2.3
  Bottom Layer 1 w2: S1.3 106,396 106,765.24 93,778.24 93,808 110,825 110,988.9 125,1003.9 142,1003.9 ; C1.2 142,1003.9 ; ICSP.5 114,1454 114,1031.9 142,1003.9
RX: RA1.7 U1.1 | length 475.6
  signal bottom w2: v1(442,732) 459,732 471,720 v1(617,720)
  Bottom Layer 1 w2: v1(442,732) 450,732 463,719 463,686 447.5,670.5 447.5,619.13 U1.1 ; RA1.7 525,718 526,717 614,717 v1(617,720)
RX/D0: nano.30 RA1.3 S1.1 | length 1086
  Top Layer 1 w2: v1(446.81,711.5) 450,708.31 450,631.81 nano.30
  signal Top w2: S1.1 100,190 100,215.45 344,459.45 344,573.28 359.52,588.8 359.52,645.52 426.49,712.49 v1(446.81,711.5) 532,796.69 v1(532,811)
  Bottom Layer 1 w2: RA1.3 525,804 v1(532,811)
TX: RA1.8 U1.5 | length 413.5
  Bottom Layer 1 w2: RA1.8 493.5,717 513,697.5 513,679.38 627.38,565 627.38,523.88 612.5,509 566.77,509 559,516.77 U1.5
TX/D1: nano.31 RA1.4 S1.2 | length 1260.7
  Top Layer 1 w2: v1(482.36,644) nano.31
  signal Top w2: S1.2 106.63,245 323,461.37 323,600.8 309,614.8 309,634.36 515.64,841 v1(532,841) 548,825 548,662.5 529.5,644 v1(482.36,644)
  Bottom Layer 1 w2: RA1.4 493.5,802.5 v1(532,841)
VIN: REG.1 S2.1 | length 1503.6
  signal Top w2: v1(576,1094) 576,677.6 597.6,656 597.6,629.74 429.5,461.64 404.64,461.64 325,382 325,358 337.5,345.5 489.5,345.5 S2.1
  Bottom Layer 1 w2: REG.1 460.55,1108.45 475,1094 v1(576,1094)
pads on no net: RA1.2 RA1.6 RA2.4 RA2.8 REG.4 U1.3 U1.6 U1.8 U1.9 U1.10 U1.11 U1.12 U1.13 U1.14 U1.19 U1.24 U1.27 U1.28 USB. USB.4 X1.2 X1.3 X1.5

## Polygon pours and split planes (outlines as drawn)
gnd on GND (split plane): 729.9,20.1 20.1,20.1 20.1,1679.9 729.9,1679.9
+5 on VCC (split plane): 729.9,20.1 20.1,20.1 20.1,1679.9 729.9,1679.9

## Silkscreen, mask and mechanical layers (free items; w line width, h text height)
Mechanical 1:
  the board outline again, w6